# Altium PCB Accelero.PcbDoc
Units mm, origin at the board's own origin, x right, y up, seen from the top; angles counter-clockwise.
Board outline 49.28 x 70.23 mm, 2 copper layers (Top Layer, Bottom Layer); 79 components, 60 nets, 312 pads, 55 vias.
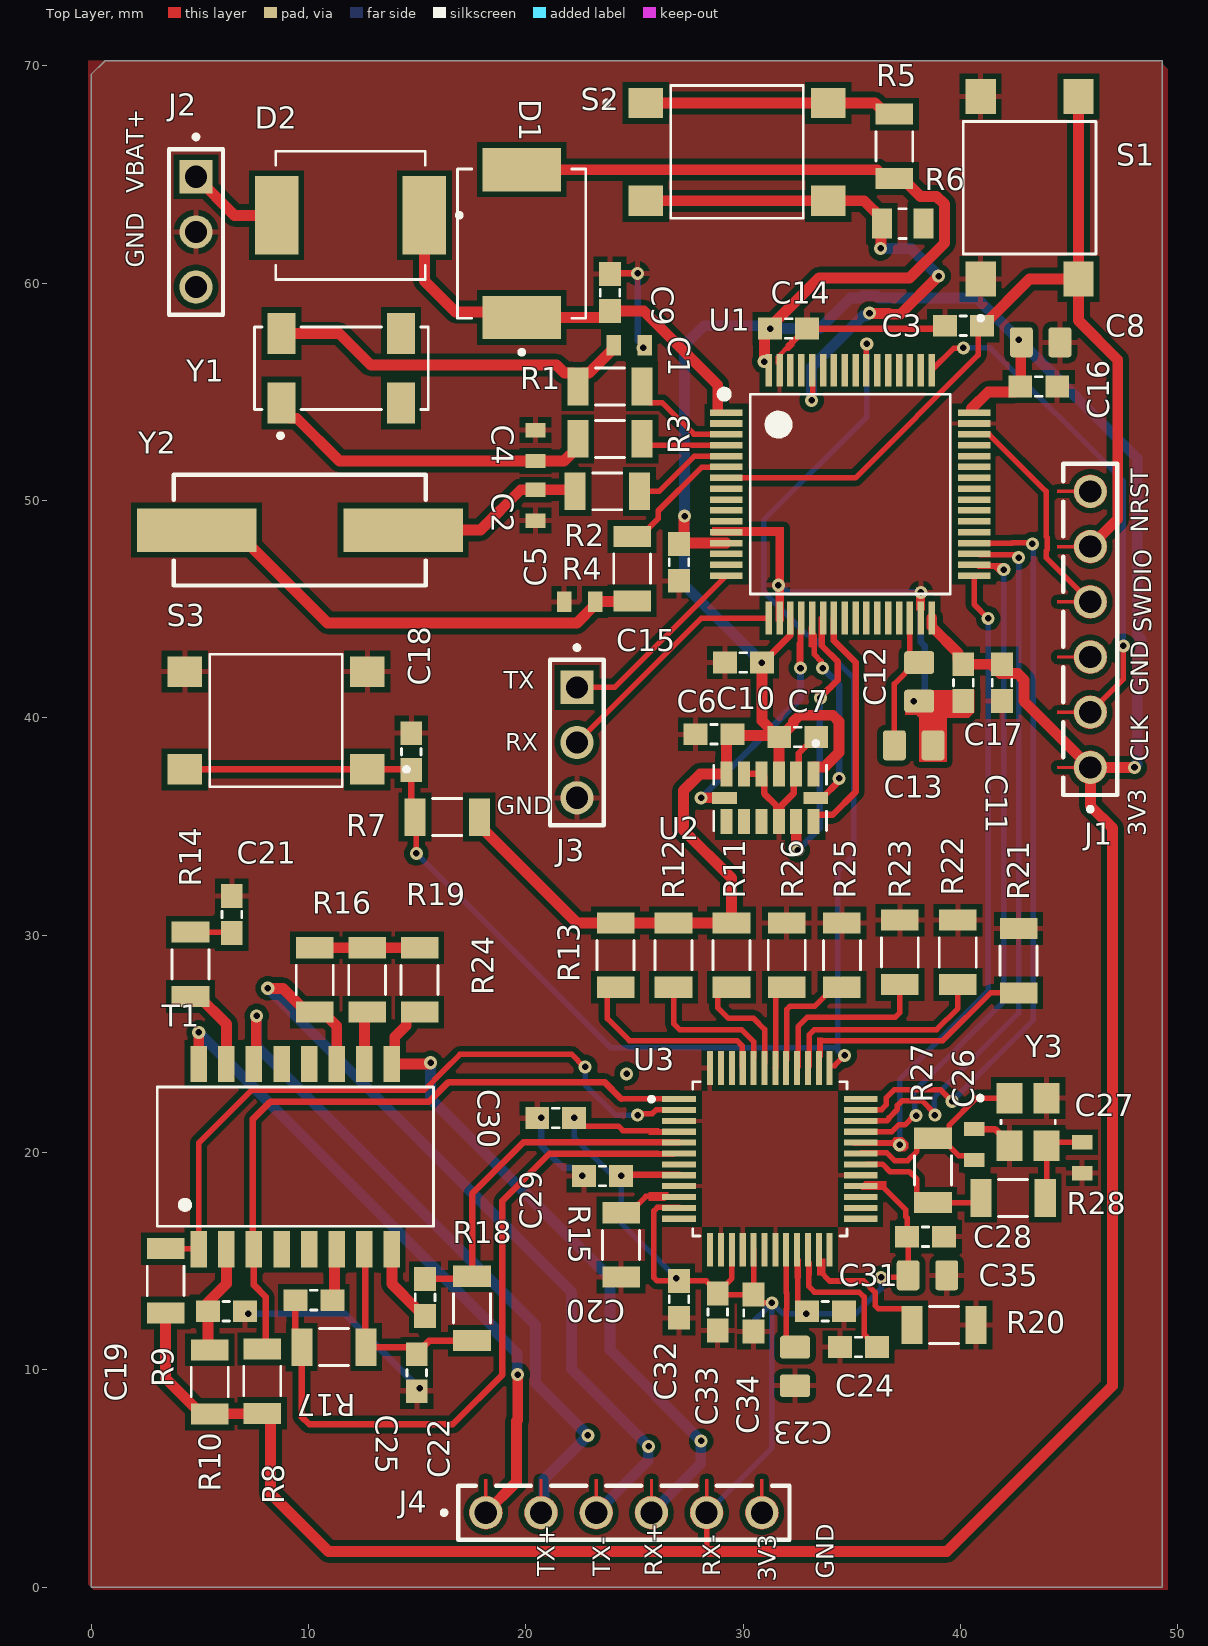
[diagram p0: Top Layer view]
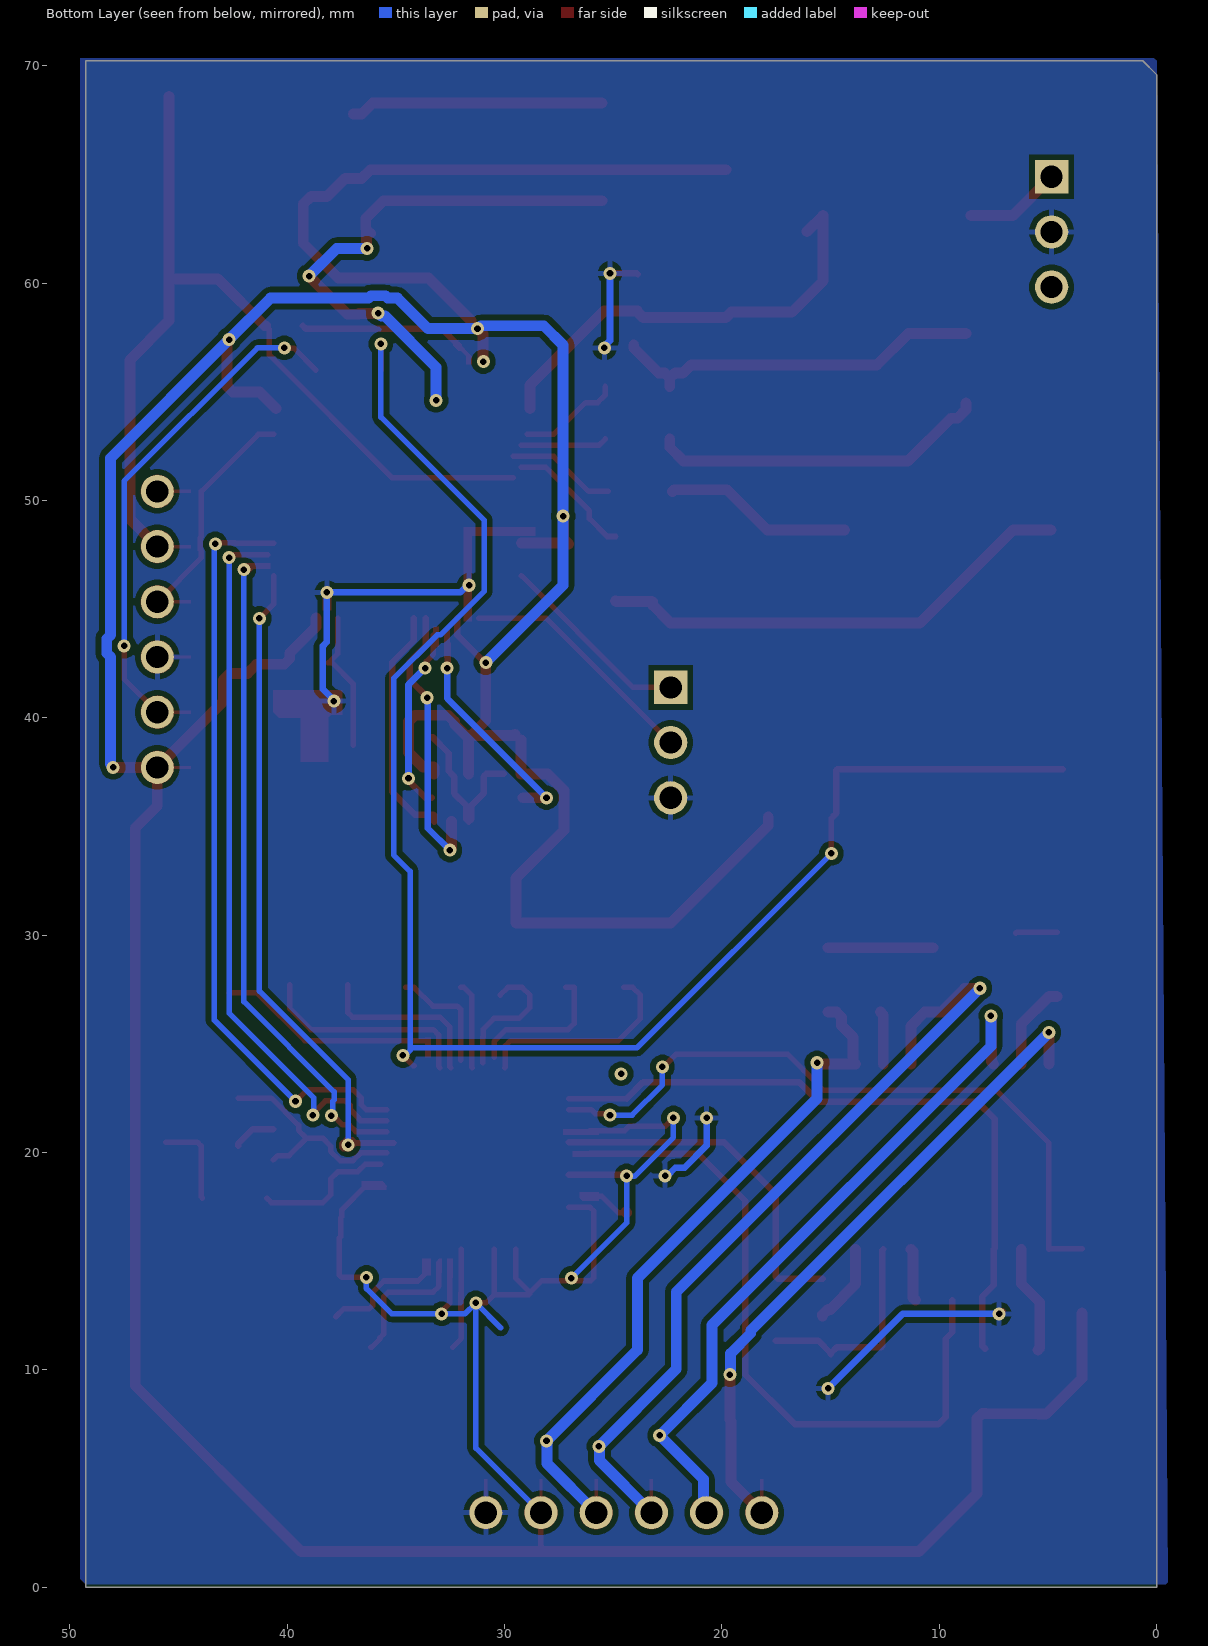
[diagram p1: Bottom Layer view, seen from below]
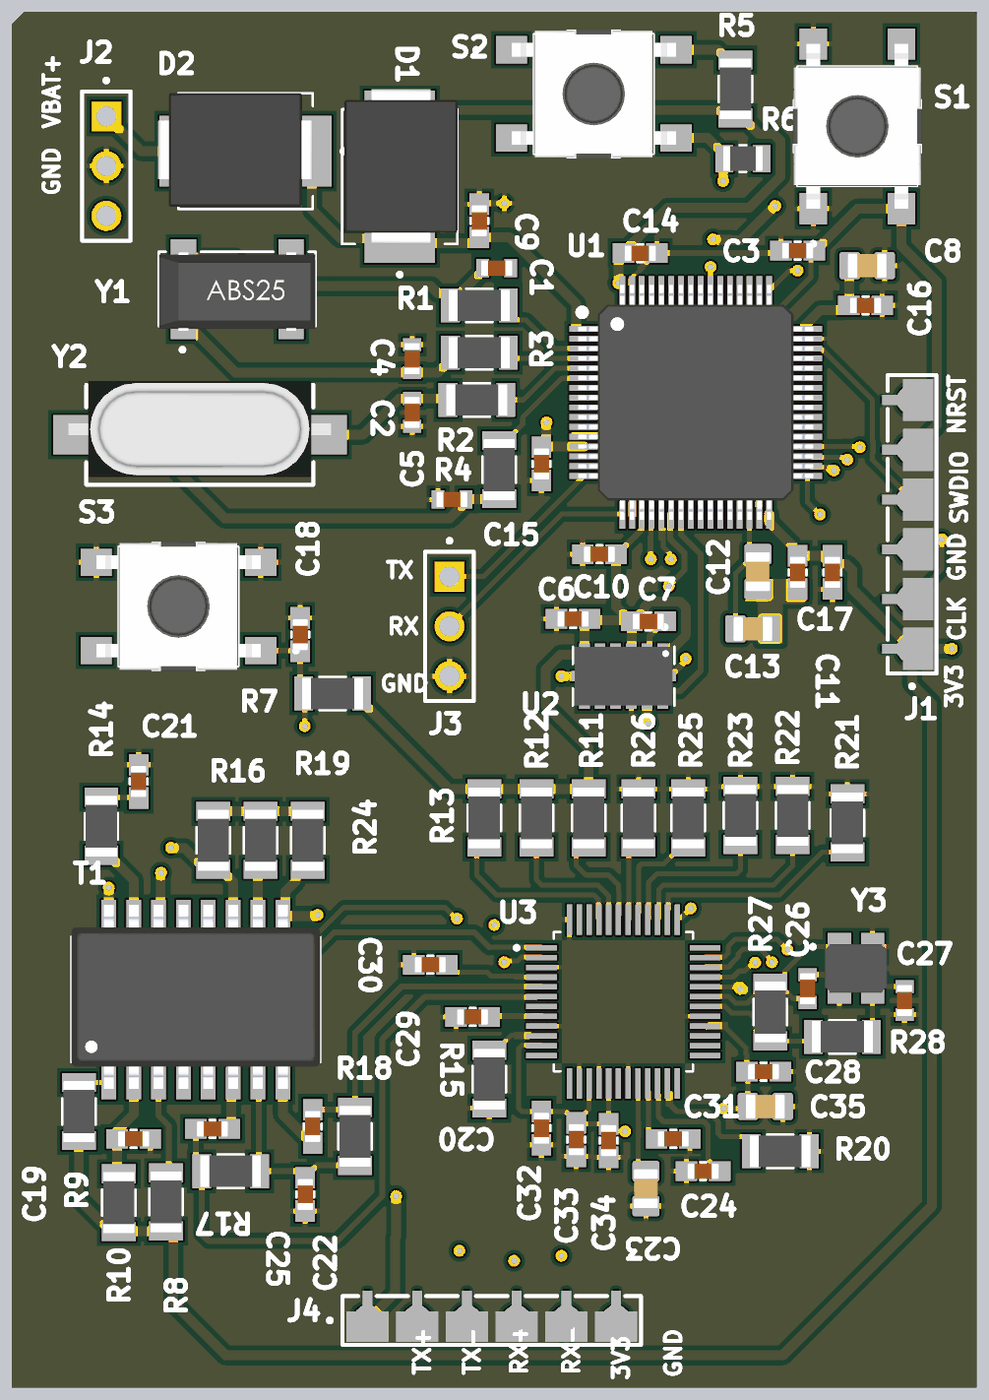
[diagram p2: 3D render of the assembled board from above, using the file's embedded part models]

## Layer stack, top to bottom
Top Solder: solder mask 0.0102, Solder Resist, Dk 3.5
Top Layer: signal copper 0.0356
Dielectric 1: dielectric 0.32, FR-4, Dk 4.8
Bottom Layer: signal copper 0.0356
Bottom Solder: solder mask 0.0102, Solder Resist, Dk 3.5

## Board outline
49.276,70.231 49.276,0 0,0 0,69.596 0.635,70.231

## Design rules (kind name [scope] priority, off if disabled: settings)
Clearance [All] p1: gap=0.254 ignorepadtopadclearanceinfootprint=FALSE
HoleSize [All] p1: absolutevalues=TRUE maxlimit=0.3 minlimit=0.2 maxpercent=80.000 minpercent=20.000
HoleToHoleClearance [All] p1: gap=0.25 allowstackedmicrovias=TRUE
PolygonConnect [All] p1: connectstyle=Relief reliefconductorwidth=0.254 reliefentries=4 polygonreliefangle="90 Angle" airgapwidth=0.254
RoutingVias [All] p1: holewidth=0.3 width=0.6 viastyle="Through Hole" minholewidth=0.3 minwidth=0.6 maxholewidth=0.3 maxwidth=0.6
SilkToSolderMaskClearance [IsPad] p1: minsilkscreentomaskgap=0.1 clearancetoexposedcopper=TRUE
SolderMaskExpansion [All] p1: expansion=0.102 istentingtop=FALSE
Width [All] p1: maxlimit=0.5 minlimit=0.254 preferedwidth=0.254
27 further rules are at their usual default settings.

## Classes and differential pairs
component class Sheet1: C18 C19 C20 C21 C22 C23 C24 C25 C26 C27 C28 C29 C30 C31 C32 C33 C34 C35 J4 R7 R8 R9 R10 R11 R12 R13 R14 R15 R16 R17 R18 R19 R20 R21 R22 R23 R24 R25 R26 R27 R28 S3 T1 U3 Y3
component class MCU: C1 C2 C3 C4 C5 C6 C7 C8 C9 C10 C11 C12 C13 C14 C15 C16 C17 D1 D2 J1 J2 J3 R1 R2 R3 R4 R5 R6 S1 S2 U1 U2 Y1 Y2

## Components (designator, comment, footprint, x,y, rotation, side; value= is the part's Value field where it differs from the comment)
C1 "4.3PF" CAPC1608X85N 24.765,57.15 r0 top
C2 "C0603C200J5GACTU" CAPC1608X85N 20.447,49.784 r90 top
C3 "100NF" CAPC1608X90 40.132,58.039 r180 top
C4 "4.3PF" CAPC1608X85N 20.447,52.527 r270 top
C5 "C0603C200J5GACTU" CAPC1608X85N 22.479,45.339 r180 top
C6 "100NF" CAPC1608X90 28.663,39.243 r0 top
C7 "100NF" CAPC1608X90 32.512,39.116 r180 top
C8 "4.7UF" CAPC2012X135N 43.688,57.277 r0 top
C9 "100nF" CAPC1608X90 23.876,59.563 r270 top
C10 "100NF" CAPC1608X90 30.011,42.545 r0 top
C11 "100NF" CAPC1608X90 41.91,41.617 r90 top
C12 "2.2UF" CAPC2012X135N 38.1,41.656 r270 top
C13 "2.2UF" CAPC2012X135N 37.846,38.735 r0 top
C14 "100NF" CAPC1608X90 32.092,57.912 r180 top
C15 "100NF" CAPC1608X90 27.051,47.156 r90 top
C16 "100NF" CAPC1608X90 43.6,55.245 r180 top
C17 "100NF" CAPC1608X90 40.132,41.617 r90 top
C18 "100NF" CAPC1608X90 14.732,38.442 r270 top
C19 "22NF" CAPC1608X90 6.223,12.7 r0 top
C20 "6.8NF" CAPC1608X90 10.248,13.208 r180 top
C21 "4.7NF" CAPC1608X90 6.477,30.949 r90 top
C22 "6.8NF" CAPC1608X90 15.367,13.335 r90 top
C23 "4.7UF" CAPC2012X135N 32.385,10.159 r270 top
C24 "10NF" CAPC1608X90 35.306,11.049 r0 top
C25 "10NF" CAPC1608X90 14.986,9.867 r270 top
C26 "18PF" CAPC1608X85N 40.64,20.371 r270 top
C27 "18PF" CAPC1608X85N 45.593,19.761 r90 top
C28 "100NF" CAPC1608X90 38.393,16.129 r180 top
C29 "100NF" CAPC1608X90 23.534,18.923 r0 top
C30 "100NF" CAPC1608X90 21.375,21.59 r0 top
C31 "100NF" CAPC1608X90 33.782,12.7 r180 top
C32 "100NF" CAPC1608X90 27.051,13.247 r90 top
C33 "100NF" CAPC1608X90 28.829,12.661 r90 top
C34 "100NF" CAPC1608X90 30.48,12.612 r90 top
C35 "10UF" CAPC2012X135N 38.48,14.351 r0 top
D1 "SS34" DIO_SS34 19.812,61.82 r90 top
D2 "SS34" DIO_SS34 11.938,63.119 r180 top
J1 "Header 6" SAMTEC_MTLW-106-06-G-S-180 45.974,44.069 r270 top
J2 "Header 3" SAMTEC_HMTSW-103-XX-X-S-XXX 4.826,62.357 r90 top
J3 "Header 3" SAMTEC_HMTSW-103-XX-X-S-XXX 22.352,38.862 r90 top
J4 "Header 6" SAMTEC_MTLW-106-06-G-S-180 24.511,3.429 r180 top locked
R1 "AC1206FR-070RL" RESC3116X65N 23.876,55.245 r180 top
R2 "AC1206FR-070RL" RESC3116X65N 23.749,50.419 r180 top
R3 "AC1206FR-070RL" RESC3116X65N 23.876,52.832 r180 top
R4 "AC1206FR-070RL" RESC3116X65N 24.892,46.863 r270 top
R5 "0 ohms" RESC3116X65N 36.957,66.294 r270 top
R6 "10k" RESC2012X60N 37.338,62.738 r180 top
R7 "10k" RESC3116X65N 16.383,35.433 r0 top
R8 "49.9" RESC3116X65N 7.874,9.481 r90 top
R9 "49.9 R" RESC3116X65N 3.429,14.097 r90 top
R10 "10R" RESC3116X65N 5.461,9.442 r90 top
R11 "10k" RESC3116X65N 29.464,29.083 r90 top
R12 "10k" RESC3116X65N 26.797,29.083 r90 top
R13 "10k" RESC3116X65N 24.13,29.083 r90 top
R14 "75R" RESC3116X65N 4.572,28.658 r90 top
R15 "12.4K" RESC3116X65N 24.384,15.748 r270 top
R16 "150R" RESC3116X65N 10.287,27.94 r90 top
R17 "82R" RESC3116X65N 11.176,11.049 r0 top
R18 "82R" RESC3116X65N 17.526,12.827 r270 top
R19 "75R" RESC3116X65N 12.7,27.94 r90 top
R20 "10k" RESC3116X65N 39.243,12.065 r180 top
R21 "10k" RESC3116X65N 42.672,28.829 r270 top
R22 "10k" RESC3116X65N 39.878,29.21 r270 top
R23 "10k" RESC3116X65N 37.211,29.21 r270 top
R24 "150R" RESC3116X65N 15.113,27.94 r270 top
R25 "10k" RESC3116X65N 34.544,29.083 r270 top
R26 "10k" RESC3116X65N 32.004,29.083 r270 top
R27 "1M" RESC3116X65N 38.735,19.177 r90 top
R28 "OHM" RESC3116X65N 42.418,17.907 r180 top
S1 "SWITCH" SW_TS07-667-43-BK-260-SMT-TR 43.18,64.389 r90 top
S2 "SWITCH" SW_TS07-667-43-BK-260-SMT-TR 29.718,66.04 r0 top
S3 "TS07-667-43-BK-260-SMT-TR" SW_TS07-667-43-BK-260-SMT-TR 8.509,39.878 r180 top
T1 "H1102NL" H1102NL 9.398,19.812 r0 top
U1 "STM32F411RET6" QFP50P1200X1200X160-64N 34.925,50.292 r0 top
U2 "ADXL345BCCZ" IC_ADXL345BCCZ 31.242,36.322 r270 top
U3 "W5500" QFP50P900X900X160-48N 31.231,19.705 r0 top
Y1 "ABS25-32.768KHZ-6-T" XTAL_ABS25-32.768KHZ-6-T 11.513,56.083 r90 top
Y2 "LFXTAL003151" WE-XTAL_HC49/4HSMX 9.601,48.641 r0 top
Y3 "ABM8G-25.000MHZ-18-D2Y-T" XTAL_ABM8G-25.000MHZ-18-D2Y-T 43.111,21.406 r0 top

## Footprints (in the part's own frame and the unit in brackets; to place one, negate y for a bottom-side part, rotate by r counter-clockwise, add the part's x,y. Pads: shape width x height; smd on the part's side, far side on the other; paste and mask are expansions set on the pad)
CAPC1608X85N [mil]
  rect 26x37 smd: 1(-28,0) 2(28,0)
  body extent -31,-16 31,16, height 34
CAPC1608X90 [mm]
  rect 1.1x1 smd: 1(-0.85,0) 2(0.85,0)
  silkscreen extent -0.15,-0.45 0.15,0.45, body extent -0.8,-0.4 0.8,0.4, height 0.95
CAPC2012X135N [mm]
  rrect25% 1.05x1.38 smd paste+0 mask+0.102: 1(-0.888,0) 2(0.888,0)
  body extent -1,-0.63 1,0.63, height 1.35
DIO_SS34 [mm]
  rect 2x3.6 smd paste+0 mask+0.102: A(3.4,0) C(-3.4,0)
  silkscreen extent -5.1,-2.95 3.44,2.95, body extent -3.43,-2.96 4.47,2.84, height 2.58
H1102NL [mm]
  rect 0.76x1.67 smd paste+0 mask+0.102: 1(-4.445,-4.265) 2(-3.175,-4.265) 3(-1.905,-4.265) 4(-0.635,-4.265) 5(0.635,-4.265) 6(1.905,-4.265) 7(3.175,-4.265) 8(4.445,-4.265) 9(4.445,4.265) 10(3.175,4.265) 11(1.905,4.265) 12(0.635,4.265) 13(-0.635,4.265) 14(-1.905,4.265) 15(-3.175,4.265) 16(-4.445,4.265)
  silkscreen extent -6.35,-3.2 6.35,3.2, body extent -6.35,-4.57 6.35,4.83, height 5.97
IC_ADXL345BCCZ [mm]
  rect 1.145x0.55 smd: 1(-1.098,2) 2(-1.098,1.2) 3(-1.098,0.4) 4(-1.098,-0.4) 5(-1.098,-1.2) 6(-1.098,-2) 8(1.098,-2) 9(1.098,-1.2) 10(1.098,-0.4) 11(1.098,0.4) 12(1.098,1.2) 13(1.098,2)
  rect 0.55x1.145 smd: 7(0,-2.097) 14(0,2.097)
  silkscreen extent -2.6,-2.6 1.5,2.6, body extent -1.5,-2.5 1.5,2.5, height 1
QFP50P900X900X160-48N [mm]
  rect 1.56x0.28 smd: 1(-4.18,2.75) 2(-4.18,2.25) 3(-4.18,1.75) 4(-4.18,1.25) 5(-4.18,0.75) 6(-4.18,0.25) 7(-4.18,-0.25) 8(-4.18,-0.75) 9(-4.18,-1.25) 10(-4.18,-1.75) 11(-4.18,-2.25) 12(-4.18,-2.75) 25(4.18,-2.75) 26(4.18,-2.25) 27(4.18,-1.75) 28(4.18,-1.25) 29(4.18,-0.75) 30(4.18,-0.25) 31(4.18,0.25) 32(4.18,0.75) 33(4.18,1.25) 34(4.18,1.75) 35(4.18,2.25) 36(4.18,2.75)
  rect 0.28x1.56 smd: 13(-2.75,-4.18) 14(-2.25,-4.18) 15(-1.75,-4.18) 16(-1.25,-4.18) 17(-0.75,-4.18) 18(-0.25,-4.18) 19(0.25,-4.18) 20(0.75,-4.18) 21(1.25,-4.18) 22(1.75,-4.18) 23(2.25,-4.18) 24(2.75,-4.18) 37(2.75,4.18) 38(2.25,4.18) 39(1.75,4.18) 40(1.25,4.18) 41(0.75,4.18) 42(0.25,4.18) 43(-0.25,4.18) 44(-0.75,4.18) 45(-1.25,4.18) 46(-1.75,4.18) 47(-2.25,4.18) 48(-2.75,4.18)
  silkscreen extent -5.55,-3.55 3.55,3.55
QFP50P1200X1200X160-64N [mm]
  rect 1.5x0.3 smd: 1(-5.7,3.75) 2(-5.7,3.25) 3(-5.7,2.75) 4(-5.7,2.25) 5(-5.7,1.75) 6(-5.7,1.25) 7(-5.7,0.75) 8(-5.7,0.25) 9(-5.7,-0.25) 10(-5.7,-0.75) 11(-5.7,-1.25) 12(-5.7,-1.75) 13(-5.7,-2.25) 14(-5.7,-2.75) 15(-5.7,-3.25) 16(-5.7,-3.75) 33(5.7,-3.75) 34(5.7,-3.25) 35(5.7,-2.75) 36(5.7,-2.25) 37(5.7,-1.75) 38(5.7,-1.25) 39(5.7,-0.75) 40(5.7,-0.25) 41(5.7,0.25) 42(5.7,0.75) 43(5.7,1.25) 44(5.7,1.75) 45(5.7,2.25) 46(5.7,2.75) 47(5.7,3.25) 48(5.7,3.75)
  rect 0.3x1.5 smd: 17(-3.75,-5.7) 18(-3.25,-5.7) 19(-2.75,-5.7) 20(-2.25,-5.7) 21(-1.75,-5.7) 22(-1.25,-5.7) 23(-0.75,-5.7) 24(-0.25,-5.7) 25(0.25,-5.7) 26(0.75,-5.7) 27(1.25,-5.7) 28(1.75,-5.7) 29(2.25,-5.7) 30(2.75,-5.7) 31(3.25,-5.7) 32(3.75,-5.7) 49(3.75,5.7) 50(3.25,5.7) 51(2.75,5.7) 52(2.25,5.7) 53(1.75,5.7) 54(1.25,5.7) 55(0.75,5.7) 56(0.25,5.7) 57(-0.25,5.7) 58(-0.75,5.7) 59(-1.25,5.7) 60(-1.75,5.7) 61(-2.25,5.7) 62(-2.75,5.7) 63(-3.25,5.7) 64(-3.75,5.7)
  silkscreen extent -6.08,-4.6 4.6,4.88, body extent -6,-6 6,6, height 1.6
RESC2012X60N [mm]
  rect 0.92x1.38 smd: 1(-0.955,0) 2(0.955,0)
  silkscreen extent -0.17,-0.68 0.17,0.68, body extent -1,-0.63 1,0.63, height 0.6
RESC3116X65N [mm]
  rect 0.97x1.73 smd: 1(-1.48,0) 2(1.48,0)
  silkscreen extent -0.67,-0.85 0.67,0.85, body extent -1.55,-0.8 1.55,0.8, height 0.65
SAMTEC_HMTSW-103-XX-X-S-XXX [mm]
  rect 1.53x1.53 / inner round 1.53 / far side rect 1.53x1.53 hole 1.02: 01(2.54,0)
  round 1.53 hole 1.02: 02(0,0) 03(-2.54,0)
  silkscreen extent -3.81,-1.24 4.47,1.24
SAMTEC_MTLW-106-06-G-S-180 [mm]
  round 1.52 hole 1.02: 01(6.35,0) 02(3.81,0) 03(1.27,0) 04(-1.27,0) 05(-3.81,0) 06(-6.35,0)
  Top Layer region: -6.271,0.756 -6.192,0.743 -6.115,0.723 -6.041,0.694 -5.97,0.658 -5.903,0.615 -5.841,0.565 -5.785,0.509 -5.735,0.447 -5.692,0.38 -5.656,0.309 -5.627,0.235 -5.607,0.158 -5.594,0.079 -5.59,0 -5.591,-0.038 -5.594,-0.076 -5.598,-0.113 -5.605,-0.151 -5.613,-0.187 -5.623,-0.224 -5.635,-0.259 -5.649,-0.294 -5.664,-0.329 -5.681,-0.363 -5.7,-0.395 -5.72,-0.427 -5.742,-0.458 -5.765,-0.487 -5.79,-0.516 -5.816,-0.543 -5.844,-0.569 -5.873,-0.593 -5.902,-0.616 -5.933,-0.638 -5.965,-0.658 -5.998,-0.676 -6.032,-0.692 -6.067,-0.707 -6.102,-0.721 -6.138,-0.732 -6.174,-0.742 -6.211,-0.75 -6.248,-0.756 -6.285,-0.76 -6.285,-1.53 -6.415,-1.53 -6.415,-0.76 -6.452,-0.756 -6.489,-0.75 -6.526,-0.742 -6.562,-0.732 -6.598,-0.721 -6.633,-0.707 -6.668,-0.692 -6.702,-0.676 -6.735,-0.658 -6.767,-0.638 -6.798,-0.616 -6.827,-0.593 -6.856,-0.569 -6.884,-0.543 -6.91,-0.516 -6.935,-0.487 -6.958,-0.458 -6.98,-0.427 -7,-0.395 -7.019,-0.363 -7.036,-0.329 -7.051,-0.294 -7.065,-0.259 -7.077,-0.224 -7.087,-0.187 -7.095,-0.151 -7.102,-0.113 -7.106,-0.076 -7.109,-0.038 -7.11,0 -7.106,0.079 -7.093,0.158 -7.073,0.235 -7.044,0.309 -7.008,0.38 -6.965,0.447 -6.915,0.509 -6.859,0.565 -6.797,0.615 -6.73,0.658 -6.659,0.694 -6.585,0.723 -6.508,0.743 -6.429,0.756 -6.35,0.76
  Top Layer region: -3.731,0.756 -3.652,0.743 -3.575,0.723 -3.501,0.694 -3.43,0.658 -3.363,0.615 -3.301,0.565 -3.245,0.509 -3.195,0.447 -3.152,0.38 -3.116,0.309 -3.087,0.235 -3.067,0.158 -3.054,0.079 -3.05,0 -3.051,-0.038 -3.054,-0.076 -3.058,-0.113 -3.065,-0.151 -3.073,-0.187 -3.083,-0.224 -3.095,-0.259 -3.109,-0.294 -3.124,-0.329 -3.141,-0.363 -3.16,-0.395 -3.18,-0.427 -3.202,-0.458 -3.225,-0.487 -3.25,-0.516 -3.276,-0.543 -3.304,-0.569 -3.333,-0.593 -3.362,-0.616 -3.393,-0.638 -3.425,-0.658 -3.458,-0.676 -3.492,-0.692 -3.527,-0.707 -3.562,-0.721 -3.598,-0.732 -3.634,-0.742 -3.671,-0.75 -3.708,-0.756 -3.745,-0.76 -3.745,-1.53 -3.875,-1.53 -3.875,-0.76 -3.912,-0.756 -3.949,-0.75 -3.986,-0.742 -4.022,-0.732 -4.058,-0.721 -4.093,-0.707 -4.128,-0.692 -4.162,-0.676 -4.195,-0.658 -4.227,-0.638 -4.258,-0.616 -4.287,-0.593 -4.316,-0.569 -4.344,-0.543 -4.37,-0.516 -4.395,-0.487 -4.418,-0.458 -4.44,-0.427 -4.46,-0.395 -4.479,-0.363 -4.496,-0.329 -4.511,-0.294 -4.525,-0.259 -4.537,-0.224 -4.547,-0.187 -4.555,-0.151 -4.562,-0.113 -4.566,-0.076 -4.569,-0.038 -4.57,0 -4.566,0.079 -4.553,0.158 -4.533,0.235 -4.504,0.309 -4.468,0.38 -4.425,0.447 -4.375,0.509 -4.319,0.565 -4.257,0.615 -4.19,0.658 -4.119,0.694 -4.045,0.723 -3.968,0.743 -3.889,0.756 -3.81,0.76
  Top Layer region: -1.191,0.756 -1.112,0.743 -1.035,0.723 -0.961,0.694 -0.89,0.658 -0.823,0.615 -0.761,0.565 -0.705,0.509 -0.655,0.447 -0.612,0.38 -0.576,0.309 -0.547,0.235 -0.527,0.158 -0.514,0.079 -0.51,0 -0.511,-0.038 -0.514,-0.076 -0.518,-0.113 -0.525,-0.151 -0.533,-0.187 -0.543,-0.224 -0.555,-0.259 -0.569,-0.294 -0.584,-0.329 -0.601,-0.363 -0.62,-0.395 -0.64,-0.427 -0.662,-0.458 -0.685,-0.487 -0.71,-0.516 -0.736,-0.543 -0.764,-0.569 -0.793,-0.593 -0.822,-0.616 -0.853,-0.638 -0.885,-0.658 -0.918,-0.676 -0.952,-0.692 -0.987,-0.707 -1.022,-0.721 -1.058,-0.732 -1.094,-0.742 -1.131,-0.75 -1.168,-0.756 -1.205,-0.76 -1.205,-1.53 -1.335,-1.53 -1.335,-0.76 -1.372,-0.756 -1.409,-0.75 -1.446,-0.742 -1.482,-0.732 -1.518,-0.721 -1.553,-0.707 -1.588,-0.692 -1.622,-0.676 -1.655,-0.658 -1.687,-0.638 -1.718,-0.616 -1.747,-0.593 -1.776,-0.569 -1.804,-0.543 -1.83,-0.516 -1.855,-0.487 -1.878,-0.458 -1.9,-0.427 -1.92,-0.395 -1.939,-0.363 -1.956,-0.329 -1.971,-0.294 -1.985,-0.259 -1.997,-0.224 -2.007,-0.187 -2.015,-0.151 -2.022,-0.113 -2.026,-0.076 -2.029,-0.038 -2.03,0 -2.026,0.079 -2.013,0.158 -1.993,0.235 -1.964,0.309 -1.928,0.38 -1.885,0.447 -1.835,0.509 -1.779,0.565 -1.717,0.615 -1.65,0.658 -1.579,0.694 -1.505,0.723 -1.428,0.743 -1.349,0.756 -1.27,0.76
  Top Layer region: 3.889,0.756 3.968,0.743 4.045,0.723 4.119,0.694 4.19,0.658 4.257,0.615 4.319,0.565 4.375,0.509 4.425,0.447 4.468,0.38 4.504,0.309 4.533,0.235 4.553,0.158 4.566,0.079 4.57,0 4.569,-0.038 4.566,-0.076 4.562,-0.113 4.555,-0.151 4.547,-0.187 4.537,-0.224 4.525,-0.259 4.511,-0.294 4.496,-0.329 4.479,-0.363 4.46,-0.395 4.44,-0.427 4.418,-0.458 4.395,-0.487 4.37,-0.516 4.344,-0.543 4.316,-0.569 4.287,-0.593 4.258,-0.616 4.227,-0.638 4.195,-0.658 4.162,-0.676 4.128,-0.692 4.093,-0.707 4.058,-0.721 4.022,-0.732 3.986,-0.742 3.949,-0.75 3.912,-0.756 3.875,-0.76 3.875,-1.53 3.745,-1.53 3.745,-0.76 3.708,-0.756 3.671,-0.75 3.634,-0.742 3.598,-0.732 3.562,-0.721 3.527,-0.707 3.492,-0.692 3.458,-0.676 3.425,-0.658 3.393,-0.638 3.362,-0.616 3.333,-0.593 3.304,-0.569 3.276,-0.543 3.25,-0.516 3.225,-0.487 3.202,-0.458 3.18,-0.427 3.16,-0.395 3.141,-0.363 3.124,-0.329 3.109,-0.294 3.095,-0.259 3.083,-0.224 3.073,-0.187 3.065,-0.151 3.058,-0.113 3.054,-0.076 3.051,-0.038 3.05,0 3.054,0.079 3.067,0.158 3.087,0.235 3.116,0.309 3.152,0.38 3.195,0.447 3.245,0.509 3.301,0.565 3.363,0.615 3.43,0.658 3.501,0.694 3.575,0.723 3.652,0.743 3.731,0.756 3.81,0.76
  Top Layer region: 6.429,0.756 6.508,0.743 6.585,0.723 6.659,0.694 6.73,0.658 6.797,0.615 6.859,0.565 6.915,0.509 6.965,0.447 7.008,0.38 7.044,0.309 7.073,0.235 7.093,0.158 7.106,0.079 7.11,0 7.109,-0.038 7.106,-0.076 7.102,-0.113 7.095,-0.151 7.087,-0.187 7.077,-0.224 7.065,-0.259 7.051,-0.294 7.036,-0.329 7.019,-0.363 7,-0.395 6.98,-0.427 6.958,-0.458 6.935,-0.487 6.91,-0.516 6.884,-0.543 6.856,-0.569 6.827,-0.593 6.798,-0.616 6.767,-0.638 6.735,-0.658 6.702,-0.676 6.668,-0.692 6.633,-0.707 6.598,-0.721 6.562,-0.732 6.526,-0.742 6.489,-0.75 6.452,-0.756 6.415,-0.76 6.415,-1.53 6.285,-1.53 6.285,-0.76 6.248,-0.756 6.211,-0.75 6.174,-0.742 6.138,-0.732 6.102,-0.721 6.067,-0.707 6.032,-0.692 5.998,-0.676 5.965,-0.658 5.933,-0.638 5.902,-0.616 5.873,-0.593 5.844,-0.569 5.816,-0.543 5.79,-0.516 5.765,-0.487 5.742,-0.458 5.72,-0.427 5.7,-0.395 5.681,-0.363 5.664,-0.329 5.649,-0.294 5.635,-0.259 5.623,-0.224 5.613,-0.187 5.605,-0.151 5.598,-0.113 5.594,-0.076 5.591,-0.038 5.59,0 5.594,0.079 5.607,0.158 5.627,0.235 5.656,0.309 5.692,0.38 5.735,0.447 5.785,0.509 5.841,0.565 5.903,0.615 5.97,0.658 6.041,0.694 6.115,0.723 6.192,0.743 6.271,0.756 6.35,0.76
  Top Layer region: 1.349,0.756 1.428,0.743 1.505,0.723 1.579,0.694 1.65,0.658 1.717,0.615 1.779,0.565 1.835,0.509 1.885,0.447 1.928,0.38 1.964,0.309 1.993,0.235 2.013,0.158 2.026,0.079 2.03,0 2.029,-0.038 2.026,-0.076 2.022,-0.113 2.015,-0.151 2.007,-0.187 1.997,-0.224 1.985,-0.259 1.971,-0.294 1.956,-0.329 1.939,-0.363 1.92,-0.395 1.9,-0.427 1.878,-0.458 1.855,-0.487 1.83,-0.516 1.804,-0.543 1.776,-0.569 1.747,-0.593 1.718,-0.616 1.687,-0.638 1.655,-0.658 1.622,-0.676 1.588,-0.692 1.553,-0.707 1.518,-0.721 1.482,-0.732 1.446,-0.742 1.409,-0.75 1.372,-0.756 1.335,-0.76 1.335,-1.53 1.205,-1.53 1.205,-0.76 1.168,-0.756 1.131,-0.75 1.094,-0.742 1.058,-0.732 1.022,-0.721 0.987,-0.707 0.952,-0.692 0.918,-0.676 0.885,-0.658 0.853,-0.638 0.822,-0.616 0.793,-0.593 0.764,-0.569 0.736,-0.543 0.71,-0.516 0.685,-0.487 0.662,-0.458 0.64,-0.427 0.62,-0.395 0.601,-0.363 0.584,-0.329 0.569,-0.294 0.555,-0.259 0.543,-0.224 0.533,-0.187 0.525,-0.151 0.518,-0.113 0.514,-0.076 0.511,-0.038 0.51,0 0.514,0.079 0.527,0.158 0.547,0.235 0.576,0.309 0.612,0.38 0.655,0.447 0.705,0.509 0.761,0.565 0.823,0.615 0.89,0.658 0.961,0.694 1.035,0.723 1.112,0.743 1.191,0.756 1.27,0.76
  silkscreen extent -7.62,-1.24 8.37,1.24
SW_TS07-667-43-BK-260-SMT-TR [mm]
  rect 1.6x1.4 smd: 1(-4.2,2.25) 2(-4.2,-2.25) 3(4.2,2.25) 4(4.2,-2.25)
  silkscreen extent -6.1,-3.05 3.05,3.05, body extent -4.2,-3.3 4.2,3.3, height 4.3
WE-XTAL_HC49/4HSMX [mm]
  rect 5.5x2 smd: 1(-4.75,0) 2(4.75,0)
  silkscreen extent -5.8,-2.55 5.8,2.55, body extent -6.7,-2.16 6.7,2.74, height 4.3
XTAL_ABM8G-25.000MHZ-18-D2Y-T [mm]
  rect 1.2x1.4 smd: 1(-0.85,1.1) 2(-0.85,-1.1) 3(0.85,-1.1) 4(0.85,1.1)
  silkscreen extent -2.3,-0.08 1.25,1.2, body extent -1.6,-1.24 1.6,1.24, height 0.99
XTAL_ABS25-32.768KHZ-6-T [mm]
  rect 1.9x1.3 smd: 1(-1.6,2.75) 2(-1.6,-2.75) 3(1.6,-2.75) 4(1.6,2.75)
  silkscreen extent -3.2,-4 1.9,4, body extent -2.13,-4 1.87,4, height 2.32

## Part data
C1 C4: library part C0603C200J5GACTU, "Capacitor, 4.3pF,±0.25pF,50V,COG,0603", Package="0603 Kemet", Check_prices=https://www.snapeda.com/parts/C0603C200J5GACTU/KEMET/view-part/?ref=eda, MF=KEMET, MP=C0603C200J5GACTU, SnapEDA_Link=https://www.snapeda.com/parts/C0603C200J5GACTU/KEMET/view-part/?ref=snap
C2 C5: "Capacitor Ceramic C0G 0603 50V 20pF", Package="0603 Kemet", Check_prices=https://www.snapeda.com/parts/C0603C200J5GACTU/KEMET/view-part/?ref=eda, MF=KEMET, MP=C0603C200J5GACTU, SnapEDA_Link=https://www.snapeda.com/parts/C0603C200J5GACTU/KEMET/view-part/?ref=snap
C3 C6 C7 C9 C10 C11 C14 C15 C16 C17 C18 C28 C29 C30 C31 C32 C33 C34: library part C0603C104J3RACTU, "0603 C 100nF Ceramic Multilayer Capacitor, 25 V, +125degC, X7R Dielectric, +/-5%", Package="603-2 KEMET", Check_prices=https://www.snapeda.com/parts/C0603C104J3RACTU/KEMET/view-part/?ref=eda, MF=KEMET, MP=C0603C104J3RACTU, SnapEDA_Link=https://www.snapeda.com/parts/C0603C104J3RACTU/KEMET/view-part/?ref=snap
C8: library part CL21B225KPFNNNG, "4.7 µF ±10% 16V Ceramic Capacitor X7R 0805 (2012 Metric)", Package="SMD-2 Samsung", Check_prices=https://www.snapeda.com/parts/CL21B225KPFNNNG/Samsung/view-part/?ref=eda, MF=Samsung, MP=CL21B225KPFNNNG, SnapEDA_Link=https://www.snapeda.com/parts/CL21B225KPFNNNG/Samsung/view-part/?ref=snap
C12 C13: library part CL21B225KPFNNNG, "2.2 ÂµF Â±10% 10V Ceramic Capacitor X7R 0805 (2012 Metric)", Package="SMD-2 Samsung", Check_prices=https://www.snapeda.com/parts/CL21B225KPFNNNG/Samsung/view-part/?ref=eda, MF=Samsung, MP=CL21B225KPFNNNG, SnapEDA_Link=https://www.snapeda.com/parts/CL21B225KPFNNNG/Samsung/view-part/?ref=snap
C19: library part C0603C104J3RACTU, "0603 C 22nF Ceramic Multilayer Capacitor, 25 V, +125degC, X7R Dielectric, +/-5%", Package="603-2 KEMET", Check_prices=https://www.snapeda.com/parts/C0603C104J3RACTU/KEMET/view-part/?ref=eda, MF=KEMET, MP=C0603C104J3RACTU, SnapEDA_Link=https://www.snapeda.com/parts/C0603C104J3RACTU/KEMET/view-part/?ref=snap
C20 C22: library part C0603C104J3RACTU, "0603 C 6.8nF Ceramic Multilayer Capacitor, 25 V, +125degC, X7R Dielectric, +/-5%", Package="603-2 KEMET", Check_prices=https://www.snapeda.com/parts/C0603C104J3RACTU/KEMET/view-part/?ref=eda, MF=KEMET, MP=C0603C104J3RACTU, SnapEDA_Link=https://www.snapeda.com/parts/C0603C104J3RACTU/KEMET/view-part/?ref=snap
C21: library part C0603C104J3RACTU, "0603 C 4.7 nF Ceramic Multilayer Capacitor, 25 V, +125degC, X7R Dielectric, +/-5%", Package="603-2 KEMET", Check_prices=https://www.snapeda.com/parts/C0603C104J3RACTU/KEMET/view-part/?ref=eda, MF=KEMET, MP=C0603C104J3RACTU, SnapEDA_Link=https://www.snapeda.com/parts/C0603C104J3RACTU/KEMET/view-part/?ref=snap
C23: library part CL21B225KPFNNNG, "4.7µF Â±10% 10V Ceramic Capacitor X7R 0805 (2012 Metric)", Package="SMD-2 Samsung", Check_prices=https://www.snapeda.com/parts/CL21B225KPFNNNG/Samsung/view-part/?ref=eda, MF=Samsung, MP=CL21B225KPFNNNG, SnapEDA_Link=https://www.snapeda.com/parts/CL21B225KPFNNNG/Samsung/view-part/?ref=snap
C24 C25: library part C0603C104J3RACTU, "0603 C 10nF Ceramic Multilayer Capacitor, 25 V, +125degC, X7R Dielectric, +/-5%", Package="603-2 KEMET", Check_prices=https://www.snapeda.com/parts/C0603C104J3RACTU/KEMET/view-part/?ref=eda, MF=KEMET, MP=C0603C104J3RACTU, SnapEDA_Link=https://www.snapeda.com/parts/C0603C104J3RACTU/KEMET/view-part/?ref=snap
C26 C27: library part C0603C200J5GACTU, "18 pF ±5% 50V Ceramic Capacitor C0G, NP0 0603 (1608 Metric)", Package="0603 Kemet", Check_prices=https://www.snapeda.com/parts/C0603C200J5GACTU/KEMET/view-part/?ref=eda, MF=KEMET, MP=C0603C200J5GACTU, SnapEDA_Link=https://www.snapeda.com/parts/C0603C200J5GACTU/KEMET/view-part/?ref=snap
C35: library part CL21B225KPFNNNG, "10 µF Â±10% 10V Ceramic Capacitor X7R 0805 (2012 Metric)", Package="SMD-2 Samsung", Check_prices=https://www.snapeda.com/parts/CL21B225KPFNNNG/Samsung/view-part/?ref=eda, MF=Samsung, MP=CL21B225KPFNNNG, SnapEDA_Link=https://www.snapeda.com/parts/CL21B225KPFNNNG/Samsung/view-part/?ref=snap
D1 D2: "3A, 40V, Schottky Rectifier", Package="DO-214AB-2 Taiwan Semiconductor", Check_prices=https://www.snapeda.com/parts/SS34/taiwan/view-part/?ref=eda, MF="Taiwan Semiconductor", MP=SS34, SnapEDA_Link=https://www.snapeda.com/parts/SS34/taiwan/view-part/?ref=snap
J1 J4: library part MTLW-106-06-G-S-180, Package=None, Availability=Unavailable, MP=MTLW-106-06-G-S-180, Price=None
J2 J3: library part HMTSW-103-XX-X-S-XXX, "Connector Unshrouded Header 3 Position 2.54mm Solder Straight Through Hole", Package=None, Check_prices=https://www.snapeda.com/parts/HMTSW-103-10-T-S-330/Samtec/view-part/?ref=eda, MF=Samtec, MP=HMTSW-103-10-T-S-330, SnapEDA_Link=https://www.snapeda.com/parts/HMTSW-103-10-T-S-330/Samtec/view-part/?ref=snap
R1 R2 R3 R4: "0 Ohms Jumper Chip Resistor 1206 (3216 Metric) Automotive AEC-Q200 Thick Film", Package="SMD-2 Yageo", Check_prices=https://www.snapeda.com/parts/AC1206FR-070RL/Yageo/view-part/?ref=eda, MF=Yageo, MP=AC1206FR-070RL, SnapEDA_Link=https://www.snapeda.com/parts/AC1206FR-070RL/Yageo/view-part/?ref=snap
R5 R28: library part AC1206FR-070RL, "0 Ohms Jumper Chip Resistor 1206 (3216 Metric) Automotive AEC-Q200 Thick Film", Package="SMD-2 Yageo", Check_prices=https://www.snapeda.com/parts/AC1206FR-070RL/Yageo/view-part/?ref=eda, MF=Yageo, MP=AC1206FR-070RL, SnapEDA_Link=https://www.snapeda.com/parts/AC1206FR-070RL/Yageo/view-part/?ref=snap
R6: library part CR0805-JW-331ELF, "10 kOhms ±5% 0.125W, 1/8W Chip Resistor 0805 (2012 Metric) Moisture Resistant Thick Film", Package="0805 Bourns", Check_prices=https://www.snapeda.com/parts/CR0805-JW-331ELF/Bourns/view-part/?ref=eda, MF=Bourns, MP=CR0805-JW-331ELF, SnapEDA_Link=https://www.snapeda.com/parts/CR0805-JW-331ELF/Bourns/view-part/?ref=snap
R7 R11 R12 R13 R20 R21 R22 R23 R25 R26: library part AC1206FR-070RL, "10 kOhms ±1% 0.25W, 1/4W Chip Resistor 1206 (3216 Metric) Moisture Resistant Thick Film", Package="SMD-2 Yageo", Check_prices=https://www.snapeda.com/parts/AC1206FR-070RL/Yageo/view-part/?ref=eda, MF=Yageo, MP=AC1206FR-070RL, SnapEDA_Link=https://www.snapeda.com/parts/AC1206FR-070RL/Yageo/view-part/?ref=snap
R8 R9: library part AC1206FR-070RL, "49.9 Ohms ±1% 0.25W, 1/4W Chip Resistor 1206 (3216 Metric) Moisture Resistant Thick Film", Package="SMD-2 Yageo", Check_prices=https://www.snapeda.com/parts/AC1206FR-070RL/Yageo/view-part/?ref=eda, MF=Yageo, MP=AC1206FR-070RL, SnapEDA_Link=https://www.snapeda.com/parts/AC1206FR-070RL/Yageo/view-part/?ref=snap
R10: library part AC1206FR-070RL, "10 Ohms ±1% 0.25W, 1/4W Chip Resistor 1206 (3216 Metric) Moisture Resistant Thick Film", Package="SMD-2 Yageo", Check_prices=https://www.snapeda.com/parts/AC1206FR-070RL/Yageo/view-part/?ref=eda, MF=Yageo, MP=AC1206FR-070RL, SnapEDA_Link=https://www.snapeda.com/parts/AC1206FR-070RL/Yageo/view-part/?ref=snap
R14 R19: library part AC1206FR-070RL, "75 Ohms Jumper Chip Resistor 1206 (3216 Metric) Automotive AEC-Q200 Thick Film", Package="SMD-2 Yageo", Check_prices=https://www.snapeda.com/parts/AC1206FR-070RL/Yageo/view-part/?ref=eda, MF=Yageo, MP=AC1206FR-070RL, SnapEDA_Link=https://www.snapeda.com/parts/AC1206FR-070RL/Yageo/view-part/?ref=snap
R15: library part AC1206FR-070RL, "12.4 kOhms ±1% 0.25W, 1/4W Chip Resistor 1206 (3216 Metric) Moisture Resistant Thick Film", Package="SMD-2 Yageo", Check_prices=https://www.snapeda.com/parts/AC1206FR-070RL/Yageo/view-part/?ref=eda, MF=Yageo, MP=AC1206FR-070RL, SnapEDA_Link=https://www.snapeda.com/parts/AC1206FR-070RL/Yageo/view-part/?ref=snap
R16 R24: library part AC1206FR-070RL, "150 Ohms Jumper Chip Resistor 1206 (3216 Metric) Automotive AEC-Q200 Thick Film", Package="SMD-2 Yageo", Check_prices=https://www.snapeda.com/parts/AC1206FR-070RL/Yageo/view-part/?ref=eda, MF=Yageo, MP=AC1206FR-070RL, SnapEDA_Link=https://www.snapeda.com/parts/AC1206FR-070RL/Yageo/view-part/?ref=snap
R17 R18: library part AC1206FR-070RL, "82 Ohms ±1% 0.25W, 1/4W Chip Resistor 1206 (3216 Metric) Moisture Resistant Thick Film", Package="SMD-2 Yageo", Check_prices=https://www.snapeda.com/parts/AC1206FR-070RL/Yageo/view-part/?ref=eda, MF=Yageo, MP=AC1206FR-070RL, SnapEDA_Link=https://www.snapeda.com/parts/AC1206FR-070RL/Yageo/view-part/?ref=snap
R27: library part AC1206FR-070RL, "1 MOhms ±1% 0.25W, 1/4W Chip Resistor 1206 (3216 Metric) Moisture Resistant Thick Film", Package="SMD-2 Yageo", Check_prices=https://www.snapeda.com/parts/AC1206FR-070RL/Yageo/view-part/?ref=eda, MF=Yageo, MP=AC1206FR-070RL, SnapEDA_Link=https://www.snapeda.com/parts/AC1206FR-070RL/Yageo/view-part/?ref=snap
S1 S2: library part TS07-667-43-BK-260-SMT-TR, "6 x 6.7 mm, 4.3 mm Actuator Height, 260 gf, Black, Surface Mount, SPST, Tactile Switch", Package=None, Check_prices=https://www.snapeda.com/parts/TS07-667-43-BK-260-SMT-TR/Same+Sky/view-part/?ref=eda, MF="Same Sky", MP=TS07-667-43-BK-260-SMT-TR, SnapEDA_Link=https://www.snapeda.com/parts/TS07-667-43-BK-260-SMT-TR/Same+Sky/view-part/?ref=snap
S3: "6 x 6.7 mm, 4.3 mm Actuator Height, 260 gf, Black, Surface Mount, SPST, Tactile Switch", Package=None, Check_prices=https://www.snapeda.com/parts/TS07-667-43-BK-260-SMT-TR/Same+Sky/view-part/?ref=eda, MF="Same Sky", MP=TS07-667-43-BK-260-SMT-TR, SnapEDA_Link=https://www.snapeda.com/parts/TS07-667-43-BK-260-SMT-TR/Same+Sky/view-part/?ref=snap
T1: "- Isolation and Data Interface (Encapsulated) Pulse Transformer 1:1 Transmitter, 1:1 Receiver Surface Mount", Package="Non Standard Pulse", Check_prices=https://www.snapeda.com/parts/H1102NL/Pulse/view-part/?ref=eda, MF=Pulse, MP=H1102NL, SnapEDA_Link=https://www.snapeda.com/parts/H1102NL/Pulse/view-part/?ref=snap
U1: "ARMÂ® CortexÂ®-M4 STM32F4 Mikrodenetleyici IC 32-Bit Tek Ã‡ekirdek 100MHz 512KB (512K x 8) FLASH 64-LQFP (10x10)", Package="LQFP-64 STMicroelectronics", Check_prices=https://www.snapeda.com/parts/STM32F411RET6/STMicroelectronics/view-part/?ref=eda, MF=STMicroelectronics, MP=STM32F411RET6, SnapEDA_Link=https://www.snapeda.com/parts/STM32F411RET6/STMicroelectronics/view-part/?ref=snap
U2: "3-Axis, Â±2 g/Â±4 g/Â±8 g/Â±16 g Digital Accelerometer", Package="LGA -14 Analog Devices", Check_prices=https://www.snapeda.com/parts/ADXL345BCCZ/Analog+Devices/view-part/?ref=eda, MF="Analog Devices", MP=ADXL345BCCZ, SnapEDA_Link=https://www.snapeda.com/parts/ADXL345BCCZ/Analog+Devices/view-part/?ref=snap
U3: "Hardwired TCP/IP embedded Ethernet controller", Package=None, Availability=Unavailable, MP=W5500, Price=None
Y1: "32.768 kHz Â±20ppm Crystal 6pF 50 kOhms 4-SOJ, 5.50mm pitch", Package="4-4 Abracon", Check_prices=https://www.snapeda.com/parts/ABS25-32.768KHZ-6-T/Abracon/view-part/?ref=eda, MF=Abracon, MP=ABS25-32.768KHZ-6-T, SnapEDA_Link=https://www.snapeda.com/parts/ABS25-32.768KHZ-6-T/Abracon/view-part/?ref=snap
Y2: "8 MHz Â±30ppm Crystal 16pF 40 Ohms HC-49/US", Package="HC-49/US IQD Frequency Products", Check_prices=https://www.snapeda.com/parts/LFXTAL003151/IQD+Frequency+Products/view-part/?ref=eda, MF="IQD Frequency Products", MP=LFXTAL003151, SnapEDA_Link=https://www.snapeda.com/parts/LFXTAL003151/IQD+Frequency+Products/view-part/?ref=snap
Y3: "25 MHz Â±20ppm Crystal 18pF 60 Ohms 4-SMD, No Lead", Package="SMD-4 Abracon", Availability="In Stock", Check_prices=https://www.snapeda.com/parts/ABM8G-25.000MHZ-18-D2Y-T/Abracon+LLC/view-part/?ref=eda, MF=Abracon, MP=ABM8G-25.000MHZ-18-D2Y-T, Price=None, Purchase-URL=https://pricing.snapeda.com/search/part/ABM8G-25.000MHZ-18-D2Y-T/?ref=eda, SnapEDA_Link=https://www.snapeda.com/parts/ABM8G-25.000MHZ-18-D2Y-T/Abracon+LLC/view-part/?ref=snap

## Via types
v1: diameter 0.6, hole 0.3, Top Layer to Bottom Layer, 55 vias

## Nets (pads, with @x,y where several pads share a name; then routed paths per layer and width w, separated by ;. In a path a pad name is that pad's centre, name@x,y a point inside that pad or via, vN(x,y) a via of type N, cw(c..) or ccw(c..) an arc to the next point about the centre after c; other vN are vias at no path point)
3V3: C6.2 C7.2 C8.1 C10.2 C11.2 C14.2 C15.2 C16.2 C17.2 C28.2 C29.2 C30.2 C31.2 C32.2 C33.2 C34.2 C35.1 D1.A J1.01 J4.05 R5.2 R7.2 R8.1 R9.1 R10.1 R11.2 R12.2 R13.2 U1.13 U1.19 U1.32 U1.48 U1.64 U2.1 U2.3 U2.6 U3.4 U3.8 U3.11 U3.15 U3.17 U3.21 U3.28 | length 294.5
  Top Layer w0.254: v1(22.225,21.59) 22.598,21.217 24.26,21.217 24.467,21.01 26.079,21.01 ; C32.2@26.924,14.097 26.039,14.097 25.89,14.246 25.89,17.312 26.057,17.479 U3.11@27.051,17.479 ; C32.2 28.293,14.097 C33.2@28.829,13.561 ; 28.067,1.651 28.321,1.905 J4.05 ; U3.15@29.481,15.549 29.481,14.213 C33.2@28.829,13.561 ; U3.17@30.481,15.549 C34.2 C34.2 ; v1(31.32,13.081) 30.853,13.081 30.48,13.454 C34.2 ; 32.489,14.59 32.489,14.582 32.512,14.559 32.512,13.073 C31.2@32.885,12.7 ; v1(36.35,14.252) 37.493,14.252 C35.1 37.592,16.08 C28.2 37.543,17 37.489,17.054 37.489,17.36 36.37,18.479 ; C33.2@28.829,13.561 C33.2 28.878,13.462 C34.2
  Top Layer w0.3: C29.2@24.44,18.979 U3.8@27.051,18.979 ; C10.2@30.911,42.545 32.175,43.809 U1.19
  Top Layer w0.5: R9.1 3.429,9.614 5.081,7.962 R10.1 5.48,7.982 7.855,7.982 R8.1 8.02,8.001 8.255,7.766 8.255,4.318 10.922,1.651 28.067,1.651 39.37,1.651 46.99,9.271 46.99,34.925 45.974,35.941 J1.01 ; R7.2 17.863,35.053 22.353,30.563 R13.2 R12.2 R11.2 29.464,32.626 27.263,34.827 27.263,36.655 28.027,37.42 U2.6 C6.2@29.242,38.993 ; D1.A 36.171,65.22 36.577,64.814 R5.2 37.337,64.814 38.161,63.99 38.903,63.99 39.257,63.637 39.257,61.839 37.648,60.23 33.497,60.23 31.542,58.275 C14.2@31.542,58.162 ; v1(24.384,18.923) C29.2@24.44,18.979 ; C15.2 C15.2@27.087,48.042 ; v1(27.305,49.276) 27.286,49.257 27.286,48.241 C15.2@27.087,48.042 ; U1.13 C15.2@27.087,48.042 ; C6.2 29.577,39.179 C7.2@31.548,39.179 ; C10.2@30.911,42.545 v1(30.861,42.545) 30.861,39.867 C7.2@31.548,39.179 ; v1(30.971,56.388) 30.99,56.407 30.99,57.662 31.24,57.912 v1(31.242,57.912) C14.2@31.175,57.845 ; U2.3 31.652,37.43 31.652,39.106 C7.2 ; U2.1 33.242,37.717 33.267,37.742 33.751,37.742 34.416,38.407 34.416,39.825 34.121,40.12 32.603,40.12 32.308,39.825 32.308,39.712 31.712,39.116 C7.2 ; U1.32 38.675,44.192 39.882,42.985 39.882,42.717 C17.2 41.402,42.467 41.832,42.037 42.633,42.037 42.926,41.744 42.926,40.767 J1.01 ; 40.513,54.229 41.279,54.995 42.5,54.995 C16.2 42.775,55.27 C8.1@42.775,57.252 ; v1(48.006,37.719) J1.01 ; C7.2@31.548,39.179 31.598,39.179 C7.2
  Bottom Layer w0.254: v1(22.225,21.59) 22.225,20.701 24.025,18.901 24.362,18.901 v1(24.384,18.923) 24.384,16.764 v1(26.924,14.224) ; J4.05 28.35,3.429 31.32,6.399 v1(31.32,13.081) ; 30.177,11.938 v1(31.32,13.081) ; v1(36.35,14.252) 36.35,13.744 35.179,12.573 31.828,12.573 v1(31.32,13.081)
  Bottom Layer w0.5: v1(30.861,42.545) 27.305,46.101 v1(27.305,49.276) 27.305,57.15 28.194,58.039 31.088,58.039 31.215,57.912 v1(31.242,57.912) 33.528,57.912 34.925,59.309 35.37,59.309 35.481,59.42 36.147,59.42 36.258,59.309 40.767,59.309 v1(42.672,57.404) 48.133,51.943 48.133,43.809 48.302,43.64 48.302,42.974 48.133,42.805 48.133,37.873 48.006,37.746 v1(48.006,37.719)
  other v1: 32.893,12.573
Boot: R6.2 S2.2 S2.4 U1.60 | length 26.1
  Top Layer w0.254: v1(33.147,54.61) 33.192,54.655 U1.60@33.192,55.499
  Top Layer w0.5: S2.2 S2.4 35.561,63.79 36.383,62.968 R6.2 36.383,62.508 36.173,62.298 36.341,62.298 36.341,61.614 v1(36.322,61.595) ; v1(35.814,58.616) 35.833,58.597 36.699,58.597 36.73,58.566 37.23,58.566 v1(38.989,60.325)
  Bottom Layer w0.5: v1(33.147,54.61) 33.147,56.128 35.505,58.486 35.657,58.486 35.787,58.616 v1(35.814,58.616) ; v1(36.322,61.595) 37.719,61.595 v1(38.989,60.325)
CLK: U1.34 U3.33 | length 29.8
  Top Layer w0.254: U3.33@35.411,20.963 36.843,20.963 37.15,21.271 37.444,21.271 37.87,21.696 v1(37.963,21.696) ; v1@41.897,46.817 v1(41.991,46.817)
  Bottom Layer w0.254: v1(37.963,21.696) 37.897,21.762 37.897,22.364 37.84,22.42 37.84,22.794 41.991,26.945 v1(41.991,46.817)
CS: U1.33 U3.32 | length 28.1
  Top Layer w0.254: U1.33 40.625,45.227 v1(41.275,44.577)
  Bottom Layer w0.254: v1(37.198,20.356) 37.198,23.355 41.275,27.432 v1(41.275,44.577)
GND: C1.2 C2.1 C3.2 C4.1 C5.2 C6.1 C7.1 C8.2 C9.1 C10.1 C11.1 C12.2 C13.2 C14.1 C15.1 C16.1 C17.1 C18.1 C19.2 C21.2 C23.2 C24.1 C25.2 C26.1 C27.1 C28.1 C29.1 C30.1 C31.1 C32.1 C33.1 C34.1 C35.2 J1.03 J2.02 J3.03 J4.06 R15.2 R20.1 R21.1 R22.1 R23.1 R25.1 R26.1 S1.1 S1.3 S3.2 S3.4 U1.12 U1.18 U1.31 U1.47 U1.63 U2.2 U2.4 U2.5 U2.11 U3.3 U3.9 U3.14 U3.16 U3.19 U3.29 U3.48 Y3.2 Y3.4 | length 52.5
  Top Layer w0.3: C19.2 7.2,12.573 v1(7.239,12.573) ; C30.1 v1(20.701,21.59) ; C9.1 23.915,60.452 v1(25.146,60.452) ; U2.5 U2.4 30.963,37.299 30.963,36.522 31.521,35.964 31.521,35.345 U2.11 31.763,35.345 31.763,35.964 32.321,36.522 32.321,37.299 U2.2 32.563,37.541 32.563,38.367 33.312,39.116 C7.1 ; 32.097,57.146 32.126,57.146 32.892,57.912 C14.1 39.155,57.912 C3.2 ; v1(37.846,40.767) C12.2 C12.2 C12.2@38.265,40.768 ; v1@38.175,45.563 v1(38.175,45.771) ; C13.2 38.734,40.134 38.64,40.228 38.64,40.393 C12.2@38.265,40.768 ; C17.1 C17.1 C12.2@38.265,40.768 ; C26.1 41.585,21.082 42.261,20.406 Y3.2
  Bottom Layer w0.3: v1(7.239,12.573) 11.684,12.573 v1(15.113,9.144) ; v1(20.701,21.59) 20.701,20.32 21.717,19.304 22.144,19.304 22.525,18.923 v1(22.606,18.923) ; v1(25.146,60.452) 25.146,57.358 25.4,57.104 v1(25.4,57.023) ; v1(31.623,46.101) 31.704,46.101 32.034,45.771 v1(38.175,45.771) 38.175,43.486 38.354,43.307 38.354,41.32 37.846,40.812 v1(37.846,40.767)
MISO: U1.35 U3.34 | length 33.3
  Top Layer w0.254: U3.34@35.411,21.471 36.632,21.471 36.706,21.545 36.706,21.597 37.101,21.992 37.101,22.169 37.309,22.377 38.245,22.377 38.817,21.805 v1(38.817,21.719) ; U1.35@40.894,47.498 42.545,47.498 v1(42.672,47.371)
  Bottom Layer w0.254: v1(38.817,21.719) 38.783,21.753 38.783,22.527 42.672,26.416 v1(42.672,47.371)
MOSI: U1.36 U3.35 | length 34.9
  Top Layer w0.254: U3.35@35.411,21.979 36.37,21.979 36.593,22.202 36.593,22.528 36.95,22.885 39.091,22.885 v1(39.616,22.36) ; U1.36 42.38,48.042 42.39,48.052 43.261,48.052 v1(43.307,48.006)
  Bottom Layer w0.254: v1(39.616,22.36) 43.353,26.097 43.353,47.96 v1(43.307,48.006)
NetC1_1: C1.1 R1.2 Y1.4 | length 17.2
  Top Layer w0.5: Y1.4 11.415,57.683 12.869,56.229 21.412,56.229 21.781,55.86 22.161,55.86 R1.2@22.396,55.625 ; R1.2 R1.2@22.396,55.625 ; C1.1 24.054,57.01 22.904,55.86 22.631,55.86 R1.2@22.396,55.625
NetC2_2: C2.2 R2.2 Y2.2 | length 8.7
  Top Layer w0.5: Y2.2 17.912,48.641 19.767,50.495 C2.2 22.193,50.495 R2.2
NetC4_2: C4.2 R3.2 Y1.1 | length 15.6
  Top Layer w0.5: Y1.1 8.763,54.183 9.163,53.783 9.463,53.783 11.43,51.816 C4.2 21.76,51.816 22.396,52.452 R3.2
NetC5_1: C5.1 R4.2 Y2.1 | length 22.3
  Top Layer w0.5: Y2.1 6.601,48.641 10.877,44.365 22.356,44.365 23.19,45.199 C5.1 23.212,45.361 24.87,45.361 R4.2
NetC19_1: C19.1 R10.2 T1.2 | length 5
  Top Layer w0.5: R10.2 5.373,11.01 C19.1 5.373,13.112 6.223,13.962 T1.2
NetC20_1: C20.1 T1.6 | length 2.4
  Top Layer w0.5: C20.1 11.201,13.31 11.201,15.445 T1.6
NetC20_2: C20.2 R17.1 U3.6 | length 31.9
  Top Layer w0.3: C20.2 9.398,11.727 9.696,11.429 R17.1 9.696,7.83 10.033,7.493 16.637,7.493 18.923,9.779 18.923,17.78 21.082,19.939 26.052,19.939 26.061,19.948 26.079,19.948
NetC21_1: C21.1 R14.2 | length 1.9
  Top Layer w0.254: R14.2 6.438,30.138 C21.1
NetC22_1: C22.1 T1.8 | length 3.8
  Top Layer w0.5: T1.8 13.843,13.946 15.004,12.785 15.117,12.785 15.367,12.535 C22.1
NetC22_2: C22.2 R18.1 U3.5 | length 16.5
  Top Layer w0.3: C22.2 17.404,14.185 R18.1 17.526,18.098 19.907,20.479 U3.5@27.051,20.479
NetC23_1: C23.1 U3.20 | length 4.7
  Top Layer w0.254: U3.20@31.981,15.549 31.981,13.559 32.001,13.539 32.001,12.799 31.981,12.779 31.981,11.445 32.379,11.047 C23.1
NetC24_2: C24.2 U3.22 | length 6
  Top Layer w0.254: 33.02,14.564 33.02,13.843 33.282,13.581 35.34,13.581 35.563,13.358 35.563,11.642 35.733,11.472 35.733,11.422 36.106,11.049 C24.2
NetC25_1: C25.1 R17.2 R18.2 T1.7 | length 9.8
  Top Layer w0.3: T1.7 12.615,15.505 12.615,11.09 R17.2 14.704,11.049 C25.1@14.986,10.767 ; C25.1 C25.1@14.986,10.767 ; R18.2 15.566,11.347 C25.1@14.986,10.767
NetC27_2: C27.2 R28.1 Y3.3 | length 4.1
  Top Layer w0.254: R28.1 43.961,17.97 Y3.3 44.127,20.472 C27.2
NetD2_A: D2.A J2.01 | length 4.4
  Top Layer w0.5: J2.01 6.604,63.119 D2.A
NetR5_1: R5.1 S2.1 S2.3 | length 11.7
  Top Layer w0.5: S2.1 S2.3 36.061,68.29 36.577,67.774 R5.1
NetR8_2: R8.2 T1.3 U3.1 | length 31.5
  Top Layer w0.254: 24.384,22.479 U3.1@27.051,22.479
  Top Layer w0.3: R8.2 8.027,11.114 8.027,13.367 7.493,13.901 T1.3 7.446,15.594 7.446,21.543 8.233,22.33 13.085,22.33 15.535,22.33 16.446,23.241 23.622,23.241 24.384,22.479
NetR9_2: R9.2 T1.1 U3.2 | length 32
  Top Layer w0.254: R9.2 4.923,15.577 T1.1 4.953,20.447 7.367,22.861 8.013,22.861 ; 8.013,22.861 13.305,22.861 15.315,22.861 16.226,23.772 16.965,24.511 22.121,24.511 22.687,23.945 v1(22.733,23.945) ; v1(25.146,21.717) 25.212,21.783 25.814,21.783 26.01,21.979 U3.2@27.051,21.979
  Bottom Layer w0.254: v1(22.733,23.945) 22.733,23.114 24.13,21.717 v1(25.146,21.717)
NetR11_1: R11.1 U3.43 | length 6.4
  Top Layer w0.254: R11.1@30.202,27.245 29.844,27.603 R11.1 29.187,27.603 28.829,27.245 28.829,26.67 29.329,26.17 30.488,26.17 30.988,25.67 30.988,25.313 31.001,25.3 U3.43@31.001,24.13
NetR12_1: R12.1 U3.44 | length 6.8
  Top Layer w0.254: R12.1@27.177,27.603 R12.1 26.797,25.93 27.073,25.654 29.928,25.654 30.481,25.101 30.481,24.891 ; U3.44@30.48,24.384 30.48,24.892 30.481,24.891 ; 30.493,24.879 30.481,24.891
NetR13_1: R13.1 U3.45 | length 9.7
  Top Layer w0.254: R13.1@24.51,27.603 R13.1 24.107,27.603 23.749,27.245 23.749,26.162 24.765,25.146 29.718,25.146 29.96,24.904 29.96,23.93 U3.45@29.981,23.909
NetR14_1: R14.1 T1.15 | length 4
  Top Layer w0.5: R14.1 4.952,27.178 6.223,25.907 T1.15
NetR15_1: R15.1 U3.10 | length 2.1
  Top Layer w0.254: R15.1 24.764,17.228 25.523,17.987 26.092,17.987
  Top Layer w0.5: R15.1 R15.1@24.417,17.261
NetR16_2: R16.2 R19.2 R24.1 | length 4.8
  Top Layer w0.5: R16.2 R19.2 R24.1
NetR19_1: R19.1 T1.10 | length 2.4
  Top Layer w0.5: T1.10 12.573,26.333 R19.1
NetR20_2: R20.2 U3.23 | length 5.5
  Top Layer w0.254: 33.528,14.552 33.528,14.543 33.982,14.089 35.55,14.089 36.071,13.568 36.071,12.959 36.227,12.803 37.405,12.803 R20.2@37.763,12.445
NetR21_2: R21.2 U3.38 | length 10
  Top Layer w0.254: 33.541,25.146 39.183,25.146 41.386,27.349 R21.2
NetR22_2: R22.2 U3.39 | length 10
  Top Layer w0.254: U3.39@32.981,23.909 33.033,23.961 33.033,25.413 33.274,25.654 38.906,25.654 39.878,26.626 R22.2
NetR23_2: R23.2 U3.40 | length 8.1
  Top Layer w0.254: U3.40@32.481,23.909 32.525,23.953 32.525,25.794 32.96,26.229 37.002,26.229 37.211,26.438 R23.2
NetR25_2: R25.2 U3.41 | length 5.3
  Top Layer w0.254: U3.41@32.017,24.257 32.017,26.588 32.165,26.737 33.298,26.737 34.164,27.603 R25.2
NetR26_2: R26.2 U3.42 | length 4
  Top Layer w0.254: U3.42@31.481,23.909 31.485,23.905 31.494,23.905 31.509,23.92 31.509,27.245 31.867,27.603 R26.2
NRST: C3.1 J1.05 S1.2 S1.4 U1.7 | length 42.3
  Top Layer w0.254: U1.7@29.591,51.042 35.164,51.042 40.813,56.691 40.813,57.87 C3.1
  Top Layer w0.5: C3.1 41.032,58.039 43.182,60.189 S1.2 ; S1.4 S1.2 ; J1.05 47.238,49.143 47.238,56.466 45.43,58.274 S1.2
PA4: U1.20 U2.7 | length 10.1
  Top Layer w0.3: 32.616,43.414 32.616,42.314 v1(32.639,42.291)
  Top Layer w0.5: v1(28.067,36.322) U2.7
  Bottom Layer w0.3: v1(28.067,36.322) 32.639,40.894 v1(32.639,42.291)
PA5: U1.21 U2.14 | length 8.6
  Top Layer w0.254: 33.274,43.798 33.274,42.917 33.589,42.602 33.589,42.357 v1(33.655,42.291)
  Top Layer w0.3: U2.14 33.637,36.322 34.36,37.045 34.36,37.154 v1(34.417,37.211)
  Bottom Layer w0.3: v1(33.655,42.291) 34.417,41.529 v1(34.417,37.211)
PA6: U1.22 U2.12 | length 13.1
  Top Layer w0.3: v1(33.557,40.924) 33.557,40.953 34.359,41.755 34.359,42.583 33.621,43.321 U1.22@33.621,44.592
  Top Layer w0.5: U2.12 32.442,34.006 32.512,33.936 v1(32.512,33.909)
  Bottom Layer w0.3: v1(32.512,33.909) 33.528,34.925 33.528,40.895 v1(33.557,40.924)
PA7: U1.23 U2.13 | length 11.1
  Top Layer w0.3: U2.13 33.242,35.518 33.267,35.543 34.121,35.543 35.17,36.592 35.17,42.555 34.175,43.55 U1.23
PC14: R1.1 U1.3 | length 4.7
  Top Layer w0.254: R1.1 25.356,54.865 25.714,54.507 26.272,54.507 27.729,53.05 U1.3@28.956,53.05
PC15: R3.1 U1.4 | length 4
  Top Layer w0.254: R3.1 25.646,52.542 U1.4
PH0: R2.1 U1.5 | length 5
  Top Layer w0.254: R2.1 26.129,50.419 27.744,52.034 U1.5@29.591,52.034
PH1: R4.1 U1.6 | length 5.9
  Top Layer w0.254: R4.1 25.272,48.343 26.095,49.166 26.095,49.527 28.094,51.526 U1.6@29.225,51.526
RST: C18.2 R7.1 S3.1 S3.3 U1.55 U3.37 | length 76.3
  Top Layer w0.254: R7.1 14.963,35.373 v1(14.963,33.766) ; 34.163,24.003 34.209,24.003 v1(34.671,24.465) ; U1.55 35.675,57.196 v1(35.687,57.208)
  Top Layer w0.3: S3.3 S3.1 14.696,37.628 C18.2 14.732,35.604 R7.1
  Bottom Layer w0.254: v1(14.963,33.766) 23.909,24.82 34.175,24.82 34.299,24.82 34.346,24.82 34.346,32.94 35.098,33.692 35.098,41.811 33.094,43.815 32.946,43.815 30.942,45.819 30.942,49.094 35.687,53.839 v1(35.687,57.208) ; 34.346,24.697 34.577,24.465 v1(34.671,24.465)
RX: J3.02 U1.17 | length 11.2
  Top Layer w0.254: J3.02 28.082,44.592 U1.17
RX+: J4.03 R16.1 T1.11 | length 38.1
  Top Layer w0.5: v1(8.128,27.559) 8.147,27.54 8.827,27.54 9.907,26.46 R16.1 10.667,26.46 11.303,25.824 T1.11 ; v1@25.654,6.45 v1(25.654,6.477)
  Bottom Layer w0.5: v1(8.128,27.559) 22.098,13.589 22.098,10.033 v1(25.654,6.477) 25.635,6.458 25.635,5.823 J4.03
RX-: J4.04 R24.2 T1.9 | length 31.8
  Top Layer w0.5: R24.2 14.733,26.46 14.498,26.225 14.498,25.845 13.973,25.32 13.973,24.207 T1.9 15.541,24.077 15.594,24.13 v1(15.621,24.13) ; v1@28.067,6.704 v1(28.067,6.731)
  Bottom Layer w0.5: v1(15.621,24.13) 15.621,22.479 23.876,14.224 23.876,10.922 v1(28.067,6.731) 28.048,6.712 28.048,5.696 J4.04
SWCLK: J1.02 U1.49 | length 23.1
  Top Layer w0.254: U1.49 39.691,57.008 40.117,57.008 v1(40.132,57.023) ; J1.02 47.498,41.783 v1(47.498,43.307)
  Bottom Layer w0.254: v1(40.132,57.023) 41.364,57.023 47.498,50.889 v1(47.498,43.307)
SWDIO: J1.04 U1.46 | length 10.4
  Top Layer w0.254: U1.46 41.319,53.042 43.942,50.419 43.942,48.334 43.988,48.288 43.988,47.724 43.942,47.678 43.942,47.371 J1.04
TX: J3.01 U1.16 | length 9
  Top Layer w0.254: J3.01 24.085,41.402 U1.16
TX+: J4.01 T1.16 | length 30.2
  Top Layer w0.5: T1.16 v1(4.953,25.527) ; J4.01 19.577,4.845 19.577,7.635 19.627,7.685 v1(19.627,9.779)
  Bottom Layer w0.5: v1(4.953,25.527) 18.669,11.811 18.669,11.684 19.608,10.745 19.608,9.798 v1(19.627,9.779)
TX-: J4.02 T1.14 | length 32.4
  Top Layer w0.5: T1.14 7.601,24.185 7.601,26.27 v1(7.62,26.289) ; v1@22.86,6.958 v1(22.86,6.985)
  Bottom Layer w0.5: v1(7.62,26.289) 7.62,24.892 20.447,12.065 20.447,9.398 v1(22.86,6.985) 20.841,4.966 20.841,3.569 J4.02
VBAT_RTC: C9.2 D1.C D2.C U1.1 | length 20.9
  Top Layer w0.5: D2.C@16.088,62.369 D2.C 15.338,60.1 16.764,58.674 19.558,58.674 D1.C 23.626,58.42 23.876,58.67 C9.2 25.426,58.713 28.829,55.31 28.829,54.229
VCAP1: C12.1 C13.1 U1.30 | length 6.5
  Top Layer w0.254: C13.1 36.958,41.567 37.935,42.544 C12.1 ; U1.30 37.675,42.942 C12.1@38.004,42.613
XI: R27.1 R28.2 U3.30 | length 6.5
  Top Layer w0.254: U3.30@35.687,19.471 36.402,19.471 36.757,19.116 37.653,19.116 37.997,18.772 37.997,18.055 38.355,17.697 R27.1 40.728,17.697 R28.2
XO: C26.2 R27.2 U3.31 Y3.1 | length 10.4
  Top Layer w0.254: U3.31@35.411,19.979 36.612,19.979 36.967,19.624 37.564,19.624 37.997,20.056 37.997,20.299 38.355,20.657 R27.2@39.115,20.657 ; C26.2 40.437,19.863 39.909,19.863 R27.2@39.115,20.657 ; Y3.1 40.725,22.506 39.473,21.254 39.473,21.015 R27.2@39.115,20.657
pads on no net: J1.06 J2.03 R6.1 T1.4 T1.5 T1.12 T1.13 U1.2 U1.8 U1.9 U1.10 U1.11 U1.14 U1.15 U1.24 U1.25 U1.26 U1.27 U1.28 U1.29 U1.37 U1.38 U1.39 U1.40 U1.41 U1.42 U1.43 U1.44 U1.45 U1.50 U1.51 U1.52 U1.53 U1.54 U1.56 U1.57 U1.58 U1.59 U1.61 U1.62 U2.8 U2.9 U2.10 U3.7 U3.12 U3.13 U3.18 U3.24 U3.25 U3.26 U3.27 U3.36 U3.46 U3.47 Y1.2 Y1.3
copper on no net:
  other v1: 24.638,23.622

## Polygon pours and split planes (outlines as drawn)
GND on Top Layer "GND_L01_P000" (solid, pour order 0): -0.127,70.231 49.149,70.231 49.53,69.85 49.53,-0.127 0.127,-0.127 -0.127,0.127
GND on Bottom Layer "GND_L02_P001" (solid, pour order 1): 0,70.231 0.127,70.358 49.53,70.358 49.53,0.381 49.276,0.127 -0.511,0.127

## Other copper
Top Layer:
  region net CLK: 40.767,46.863 41.529,46.863 41.783,46.609 42.037,46.609 42.291,46.863 42.037,47.117 41.529,47.117 40.767,47.117
  region net 3V3: 25.654,21.082 27.305,21.082 27.305,20.828 25.654,20.828
  region net CS: 35.052,20.574 36.83,20.574 36.957,20.701 37.338,20.701 37.592,20.447 37.592,20.193 37.465,20.066 37.084,20.066 36.83,20.32 35.052,20.32 34.925,20.447
  region net GND: 38.354,44.958 37.973,44.958 37.973,45.974 38.354,45.974
  region net GND: 37.465,41.275 40.64,41.275 40.64,40.259 40.386,40.005 39.37,40.005 39.37,37.973 38.1,37.973 38.1,40.005 37.973,40.132 37.465,40.132
  region net GND: 28.575,48.387 28.575,48.768 31.877,48.768 31.877,48.387
  region net GND: 31.496,44.45 31.877,44.45 31.877,48.768 31.496,48.768
  region net GND: 31.496,56.642 32.131,57.277 32.131,57.404 32.385,57.15 32.131,56.896 32.004,56.896 31.75,56.642 31.75,56.261 31.496,56.261
  region net NetR21_2: 33.655,24.384 33.401,24.384 33.401,25.273 33.655,25.273
  region net NetR15_1: 25.654,18.161 26.543,18.161 26.543,17.907 26.416,17.78 25.654,17.78
  region net 3V3: 35.411,18.479 35.601,18.669 36.576,18.669 36.576,18.288 35.433,18.288
  region net NetR20_2: 33.401,15.113 33.782,15.113 33.782,14.343 33.755,14.316 33.72,14.351 33.401,14.351
  region net NetC24_2: 32.893,15.113 33.02,15.113 33.147,14.986 33.147,14.351 33.02,14.351 32.893,14.478
  region net 3V3: 32.639,15.113 32.385,15.113 32.385,14.224 32.639,14.224
  region net PA4: 32.512,44.069 32.766,44.069 32.766,42.758 32.658,42.651 32.512,42.797
  region net PA5: 33.02,44.196 33.274,44.196 33.274,43.399 33.274,43.18 33.02,43.279 33.02,44.069
  region net NetC20_2: 25.971,20.066 26.86,20.066 26.86,19.812 25.971,19.812

## Silkscreen, mask and mechanical layers (free items; w line width, h text height)
Top Overlay:
  text "VBAT+" at 2.413,64.135 h0.8 r90
  text "GND" at 2.413,60.706 h0.8 r90
  text "NRST" at 48.641,48.514 h0.8 r90
  text "SWDIO" at 48.768,43.942 h0.8 r90
  text "TX" at 18.996,41.348 h0.8
  text "GND" at 48.641,41.021 h0.8 r90
  text "RX" at 19.05,38.481 h0.8
  text "CLK" at 48.641,37.973 h0.8 r90
  text "GND" at 18.669,35.56 h0.8
  text "3V3" at 48.514,34.544 h0.8 r90
  text "TX+" at 21.336,0.508 h0.8 r90
  text "TX-" at 23.876,0.508 h0.8 r90
  text "RX+" at 26.289,0.508 h0.8 r90
  text "RX-" at 28.956,0.508 h0.8 r90
  text "GND" at 34.163,0.381 h0.8 r90
  text "3V3" at 31.496,0.254 h0.8 r90